# EAGLE board Sediment Board single (EAGLE 7.6.0)
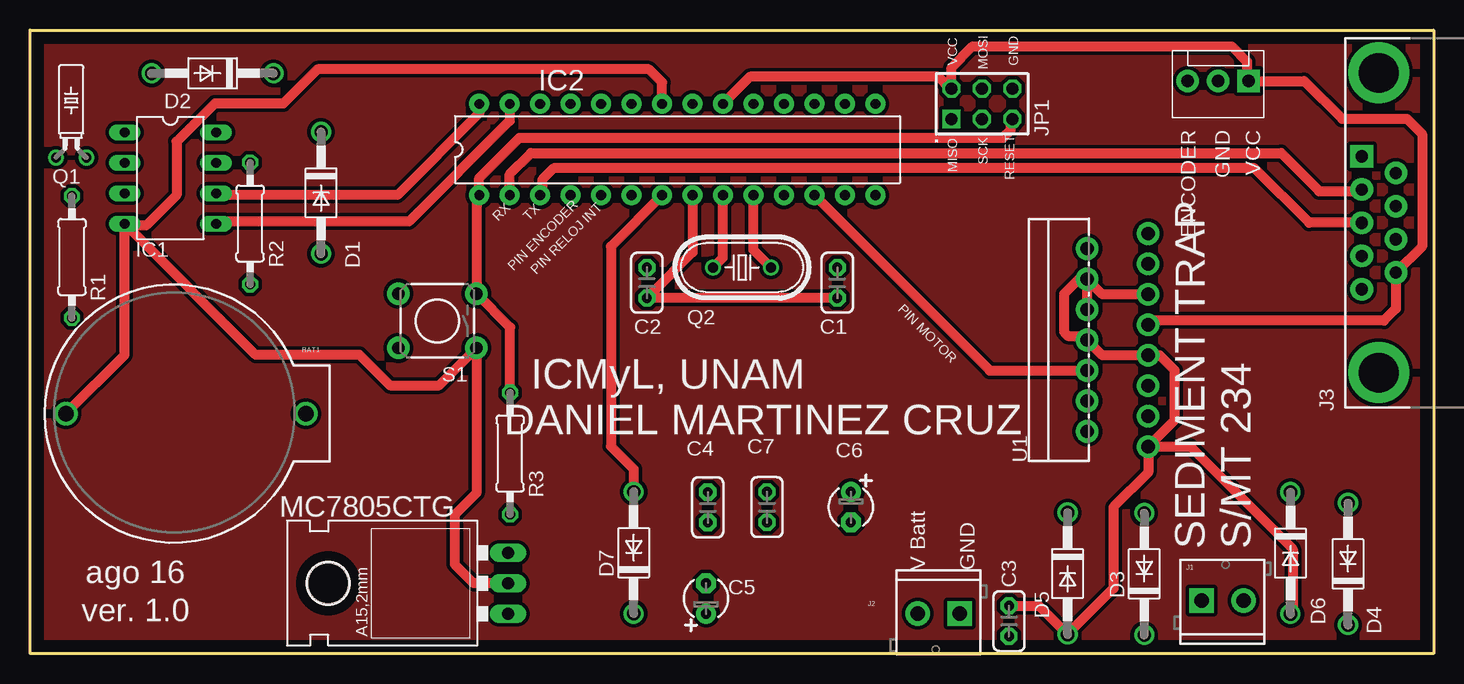
[diagram p0: board, top side]
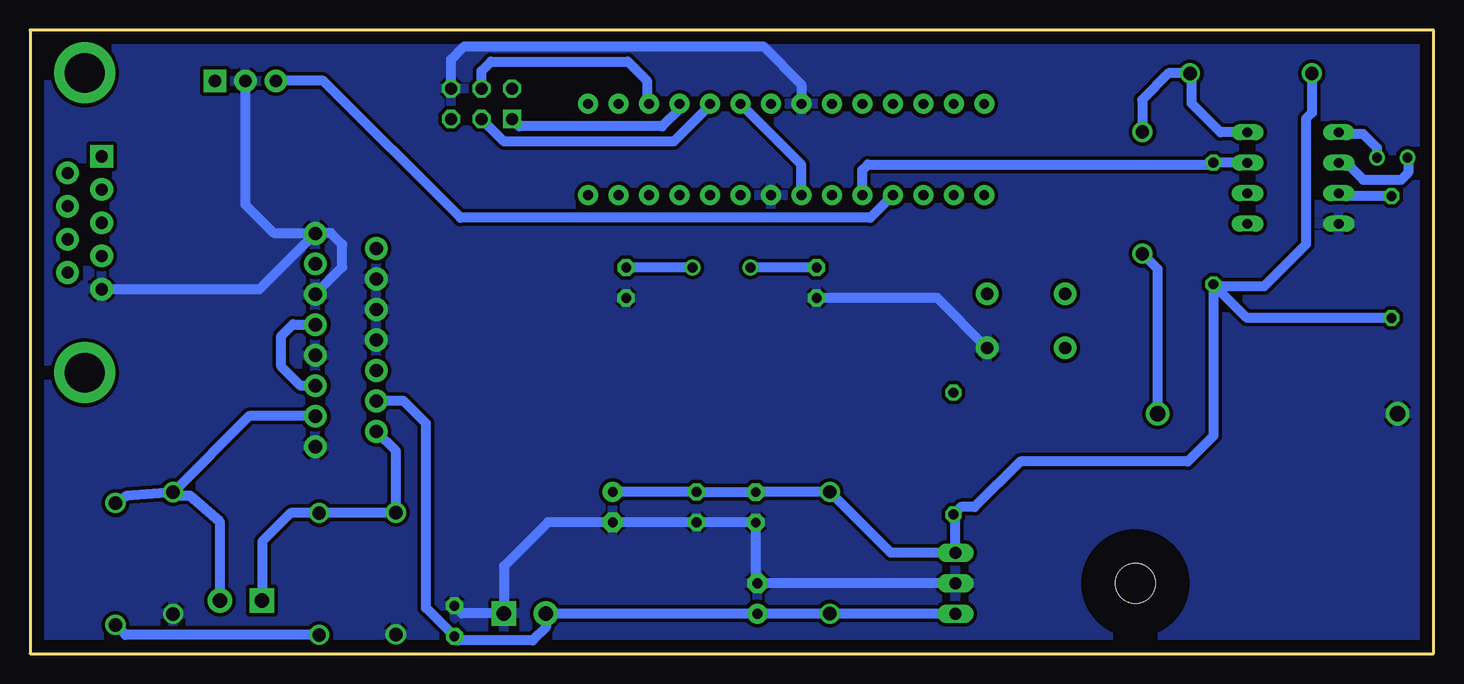
[diagram p1: board, bottom side, seen from below]

Size 117 x 52 mm. Coordinates in mm from the lower left corner, seen from the top.
Outline: 0,52 117,52 117,0 0,0 0,52
Copper layers (1*16): Top 0.035mm / dielectric 1.5mm / Bottom 0.035mm
Design rules "default": minimum track width 10mil, minimum drill 24mil, track to track 8mil, track to pad 8mil, pad to pad 8mil, via to via 8mil, smd to smd 8mil, copper to edge 40mil, drill to drill 8mil, minimum pad ring 10mil, minimum via ring 8mil, stop-mask expansion 4mil, vias tented up to drill 0mil, thermal gap 10mil
Net classes: 0 default: clearance 0.205 mm

## Footprints (pad centres in the part's own frame; a part is rotated, then mirrored left to right if it is on the bottom)
BATTCOM_20MM_PTH = drill 1.3: 1 20,0; 2 0,0
C025-050X025 = drill 0.813 pad 1.422 octagon: 1 -1.27,0; 2 1.27,0
TT-025-040 = drill 0.813 pad 1.676: + -1.27,0 | drill 0.813 pad 1.676 octagon: - 1.27,0
DO41-10 = drill 1.118: A 5.08,0; C -5.08,0
DIL08 = drill 0.813 long: 1 -3.81,-3.81; 2 -1.27,-3.81; 3 1.27,-3.81; 4 3.81,-3.81; 5 3.81,3.81; 6 1.27,3.81; 7 -1.27,3.81; 8 -3.81,3.81
DIL28-3-ROUND = drill 0.813 pad 1.676: 1 -16.51,-3.81; 2 -13.97,-3.81; 3 -11.43,-3.81; 4 -8.89,-3.81; 5 -6.35,-3.81; 6 -3.81,-3.81; 7 -1.27,-3.81; 8 1.27,-3.81; 9 3.81,-3.81; 10 6.35,-3.81; 11 8.89,-3.81; 12 11.43,-3.81; 13 13.97,-3.81; 14 16.51,-3.81; 15 16.51,3.81; 16 13.97,3.81; 17 11.43,3.81; 18 8.89,3.81; 19 6.35,3.81; 20 3.81,3.81; 21 1.27,3.81; 22 -1.27,3.81; 23 -3.81,3.81; 24 -6.35,3.81; 25 -8.89,3.81; 26 -11.43,3.81; 27 -13.97,3.81; 28 -16.51,3.81
SCREWTERMINAL-3.5MM-2 = drill 1.2 pad 2.032 square: 1 0,0 | drill 1.2 pad 2.032: 2 3.5,0
DB9 = drill 1.016 pad 1.88 square: 1 -5.54,-1.42 | drill 1.016 pad 1.88: 2 -2.77,-1.42; 3 0,-1.42; 4 2.77,-1.42; 5 5.54,-1.42; 6 -4.15,1.42; 7 -1.38,1.42; 8 1.38,1.42; 9 4.15,1.42 | drill 3.302 pad 5.08: G1 -12.5,0; G2 12.5,0
AVR-ISP-6 = drill 1.016 square: 1 -2.54,-1.27 | drill 1.016 octagon: 2 -2.54,1.27; 3 0,-1.27; 4 0,1.27; 5 2.54,-1.27; 6 2.54,1.27
MOLEX-1X3 = drill 1.016 pad 1.88 square: 1 0,0 | drill 1.016 pad 1.88: 2 2.54,0; 3 5.08,0
78XXL = drill 1.016 long: GND 0,-3.81; IN -2.54,-3.81; OUT 2.54,-3.81 | hole 3.302: 0,11.176
TC26H = drill 0.813: 1 -1.27,0; 2 1.27,0
HC49U70 = drill 0.813: 1 -2.413,0; 2 2.413,0
0207/10 = drill 0.813 octagon: 1 -5.08,0; 2 5.08,0
TACTILE-PTH = drill 1.016 pad 1.88: 1 -3.251,2.261; 2 3.251,2.261; 3 -3.251,-2.261; 4 3.251,-2.261
MULTIWATT15 = drill 1.1 pad 1.9: 1 -8.95,-2.39; 2 -7.68,2.69; 3 -6.41,-2.39; 4 -5.14,2.69; 5 -3.87,-2.39; 6 -2.6,2.69; 7 -1.33,-2.39; 8 -0.06,2.69; 9 1.21,-2.39; 10 2.48,2.69; 11 3.75,-2.39; 12 5.02,2.69; 13 6.29,-2.39; 14 7.56,2.69; 15 8.83,-2.39

## Placement (x,y rotation side)
BAT1  CR2032  [BATTCOM_20MM_PTH]  2.99,20.01 0 top
C1  22pF  [C025-050X025]  67.3,30.92 90 top
C2  22pF  [C025-050X025]  51.42,30.92 270 top
C3  100nF  [C025-050X025]  81.61,2.71 270 top
C4  100nF  [C025-050X025]  56.5,12.19 90 top
C5  0.33uF  [TT-025-040]  56.36,4.59 90 top
C6  1uF  [TT-025-040]  68.42,12.21 270 top
C7  22uF  [C025-050X025]  61.44,12.21 90 top
D1  1N4004  [DO41-10]  24.27,38.42 270 top
D2  1N4004  [DO41-10]  15.23,48.38 180 top
D3  1N4947  [DO41-10]  92.89,6.64 90 top
D4  1N4947  [DO41-10]  109.87,7.47 90 top
D5  1N4947  [DO41-10]  86.5,6.67 270 top
D6  1N4947  [DO41-10]  105.08,8.38 270 top
D7  1N4004  [DO41-10]  50.33,8.4 90 top
IC1  PCF8583P  [DIL08]  11.7,39.65 270 top
IC2  ATMEGA328P  [DIL28-3-ROUND]  53.96,42.03 0 top
J1  Motor  [SCREWTERMINAL-3.5MM-2]  97.66,4.41 0 top
J2  VH_Batt  [SCREWTERMINAL-3.5MM-2]  77.49,3.34 180 top
J3  DB9_Fem  [DB9]  112.44,35.92 270 top
JP1  AVR-ISP-6  [AVR-ISP-6]  79.36,45.84 0 top
JP3  ENCODER  [MOLEX-1X3]  101.58,47.75 180 top
MC7805CTG  +5V  [78XXL]  36.04,5.86 90 top
Q1  32.768kHz  [TC26H]  3.44,41.35 0 top
Q2  16MHz  [HC49U70]  59.36,32.19 180 top
R1  10k  [0207/10]  3.49,33.07 270 top
R2  10k  [0207/10]  18.35,35.87 270 top
R3  10k  [0207/10]  40.02,16.68 270 top
S1  SW-2PTH  [TACTILE-PTH]  33.96,27.74 180 top
U1  L298  [MULTIWATT15]  90.82,26.2 90 top

## Library data of the parts
BAT1 JP3 MC7805CTG S1 U1 = SparkFun
C1-C7 = cap-master
D1-D7 = diode
IC1 = ds1307_pcf8583
IC2 = atmega328
J1 J2 = SparkFun-Connectors; PROD_ID: CONN-08399
J3 = SparkFun-Connectors; PROD_ID: CONN-08194
JP1 = atmel-1
Q1 Q2 = crystal; OC_FARNELL: unknown; OC_NEWARK: unknown
R1-R3 = resistor

## Nets
CLK_INT: IC1.7 IC2.5 R2.1
ENCODER: IC2.4 JP3.3
GND: BAT1.2 C1.1 C2.2 C3.1 C4.1 C5.- C6.- C7.1 D5.A D6.A IC1.4 IC2.8 IC2.22 J2.1 J3.5 JP1.6 JP3.2 MC7805CTG.GND S1.1 U1.1 U1.7 U1.8 U1.10 U1.11 U1.12 U1.15
MISO: IC2.18 JP1.1
MOSI: IC2.17 JP1.4
N$1: D1.C D2.C IC1.8
N$2: IC1.1 Q1.2
N$3: IC1.2 Q1.1
N$5: BAT1.1 D1.A
N$6: IC1.3 R1.1
N$7: C2.1 IC2.9 Q2.2
N$8: C1.2 IC2.10 Q2.1
OUT1: D3.A D5.C J1.1 U1.2
OUT2: D4.A D6.C J1.2 U1.3
PIN_MOTOR: IC2.12 U1.6
RESET: IC2.1 JP1.5 R3.1 S1.3
RX: IC2.2 J3.2
SCK: IC2.19 JP1.3
SCL: IC1.6 IC2.28
SDA: IC1.5 IC2.27
TX: IC2.3 J3.3
VCC: C4.2 C6.+ C7.2 D2.A D7.A IC2.7 IC2.20 J3.9 JP1.2 JP3.1 MC7805CTG.OUT R1.2 R2.2 R3.2 U1.5 U1.9
VH: C3.2 C5.+ D7.C J2.2 MC7805CTG.IN U1.4
VH+: D3.C D4.C

## Tracks (layer width: path | path; a pad name or v marks a point on that pad's centre or on a via)
CLK_INT
  Bottom 0.813: IC1.7 18.32,40.92 R2.1 18.51,40.78 47.15,40.78 47.61,40.33 IC2.5
ENCODER
  Bottom 0.813: IC2.4 46.95,36.34 81.12,36.34 92.55,47.77 96.48,47.77 JP3.3
GND
  Top 0.813: IC1.4 7.89,24.9 BAT1.2 | C3.1 84.11,3.98 D5.A 90.33,5.42 90.33,12.21 93.21,15.09 U1.1 | U1.11 89.4,29.95 U1.12 | U1.12 87.44,31.22 86.2,29.99 86.2,26.81 86.52,26.5 87.78,26.5 U1.8 89.4,24.87 U1.7 94.18,24.87 95.41,23.64 95.41,19.45 U1.1 | U1.10 U1.12 | IC2.8 55.23,33.46 51.84,30.07 | 51.84,30.07 C2.2 | C1.1 52.25,29.65 51.84,30.07 | U1.1 96.72,17.25 105.25,8.72 105.25,3.47 D6.A | MC7805CTG.GND 36.99,5.86 35.4,7.45 35.4,11.57 37.21,13.38 S1.1 34.09,22.37 30.01,22.37 27.47,24.9 18.83,24.9 IC1.4 | IC2.22 52.69,47.63 51.59,48.72 23.97,48.72 21.11,45.87 15.4,45.87 12.23,42.69 12.23,38.24 9.68,35.7 8.03,35.7 IC1.4
  Bottom 0.813: S1.1 41.37,29.65 C2.2 | MC7805CTG.GND C5.- 56.5,6 C4.1 56.52,10.94 C7.1 C6.- 73.82,10.94 77.49,7.27 J2.1 80.98,3.34 C3.1 | JP1.6 81.9,49.53 80.81,50.63 55.86,50.63 52.69,47.45 IC2.22 | JP3.2 99.05,37.44 96.68,35.07 93.25,35.07 U1.15 | J3.5 97.86,30.38 U1.15 | U1.11 93.21,29.97 90.97,32.21 90.97,34.12 91.92,35.07 93.17,35.07 U1.15
  pour Bottom (isolate 0.305): 0.16,51.9 117,51.9 117,0.14 0.16,0.14
MISO
  Bottom 0.813: IC2.18 62.85,45.41 64.3,43.96 76.21,43.96 JP1.1
MOSI
  Bottom 0.813: JP1.4 79.36,48.58 78.58,49.36 67.15,49.36 65.56,47.77 65.56,46.02 IC2.17
N$1
  Bottom 0.813: D2.C 20.8,48.38 | 20.8,48.38 22.09,48.38 24.29,46.18 24.29,43.52 D1.C | IC1.8 17.76,43.46 20.16,45.87 20.16,47.75 20.8,48.38
N$2
  Bottom 0.813: Q1.2 4.71,42.16 5.88,43.33 7.76,43.33 IC1.1
N$3
  Bottom 0.813: IC1.2 7.28,40.92 5.88,39.52 2.7,39.52 2.06,40.15 2.06,41.26 Q1.1
N$4
  pour Top (isolate 0.305): -0.16,51.9 117,51.9 117,-0.17 -0.16,-0.17
N$5
  Bottom 0.813: BAT1.1 22.99,32.07 D1.A
N$6
  Bottom 0.813: R1.1 7.66,38.15 IC1.3
N$7
  Top 0.813: Q2.2 57.77,33.02 IC2.9
  Bottom 0.813: C2.1 Q2.2
N$8
  Top 0.813: Q2.1 60.31,33.65 IC2.10
  Bottom 0.813: Q2.1 C1.2
OUT1
  Bottom 0.813: J1.1 97.63,4.44 97.63,9.35 95.27,11.72 D3.A 92.86,11.75 D5.C 86.5,16.89 U1.2
OUT2
  Bottom 0.813: 105.06,13.12 D6.C | D6.C 108.97,13.14 D4.A | J1.2 101.16,10.97 103.67,13.16 105.06,13.16 D6.C | U1.3 98.74,19.79 D6.C
PIN_MOTOR
  Top 0.813: IC2.12 80.01,23.6 U1.6
RESET
  Top 0.813: JP1.5 81.76,44.43 81.76,43.64 81.12,43.01 40.8,43.01 37.45,39.66 IC2.1 37.21,37.98 S1.3 40.02,27.19 R3.1
RX
  Top 0.813: IC2.2 39.99,39.98 41.75,41.74 104.3,41.74 107.47,38.56 110.89,38.56 J3.2
SCK
  Bottom 0.813: IC2.19 60.31,45.72 63.34,42.69 77.48,42.69 JP1.3
SCL
  Top 0.813: IC2.28 37.45,45.05 30.64,38.24 15.65,38.24 IC1.6
SDA
  Top 0.813: IC2.27 39.99,44.42 31.59,36.02 15.7,36.02 IC1.5
TX
  Top 0.813: J3.3 106.62,35.92 102.08,40.47 43.66,40.47 42.7,39.52 42.7,38.4 IC2.3
VCC
  Top 0.813: IC2.7 48.42,33.95 48.42,17.29 50.33,15.38 D7.A | U1.9 93.57,27.77 112.87,27.77 113.86,28.76 J3.9 116.05,33.95 116.05,43.33 114.78,44.59 109.38,44.59 106.23,47.75 JP3.1 101.44,47.89 101.44,49.36 100.17,50.63 78.58,50.63 76.82,48.86 JP1.2 76.7,47.11 75.72,48.09 60.02,48.09 IC2.20
  Bottom 0.813: C6.+ C7.2 61.42,13.46 C4.2 56.48,13.48 D7.A 45.24,8.4 MC7805CTG.OUT 39.85,11.42 R3.2 39.41,12.21 38.26,12.21 34.45,16.02 20.48,16.02 18.35,18.15 R2.2 | U1.5 94.42,22.33 96.05,23.96 96.05,26.5 95.09,27.45 93.25,27.45 U1.9 | D2.A 10.14,45.09 10.64,44.59 10.64,34.12 14.13,30.62 18.19,30.62 R2.2 | IC2.7 52.69,40.76 IC2.20 | R1.2 15.55,27.99 R2.2
VH
  Bottom 0.813: MC7805CTG.IN D7.C C5.+ 73.97,3.32 J2.2 73.99,2.2 75.09,1.1 81.28,1.1 C3.2 83.98,3.8 83.98,19.2 85.85,21.06 U1.4
VH+
  Bottom 0.813: D3.C 109.04,1.56 D4.C

## Text on the board
tPlace: VCC | MOSI | GND | ENCODER | GND | VCC | . | SCK | MISO | RESET | RX | TX | PIN ENCODER | PIN RELOJ INT | ICMyL, UNAM | PIN MOTOR | DANIEL MARTINEZ CRUZ | V Batt | GND | SEDIMENT TRAP / S/MT 234 | ago 16 | ver. 1.0